# Altium PCB 1.PcbDoc (part 1 of 2)
Units mm, origin at the board's own origin, x right, y up, seen from the top; angles counter-clockwise.
Board outline 30 x 50 mm, 4 copper layers (Top Layer, Middle1, Middle2, Bottom Layer), stack 0.778 mm thick; 91 components, 108 nets, 401 pads, 138 vias.
Unrouted connection lines stored in the file: 70.
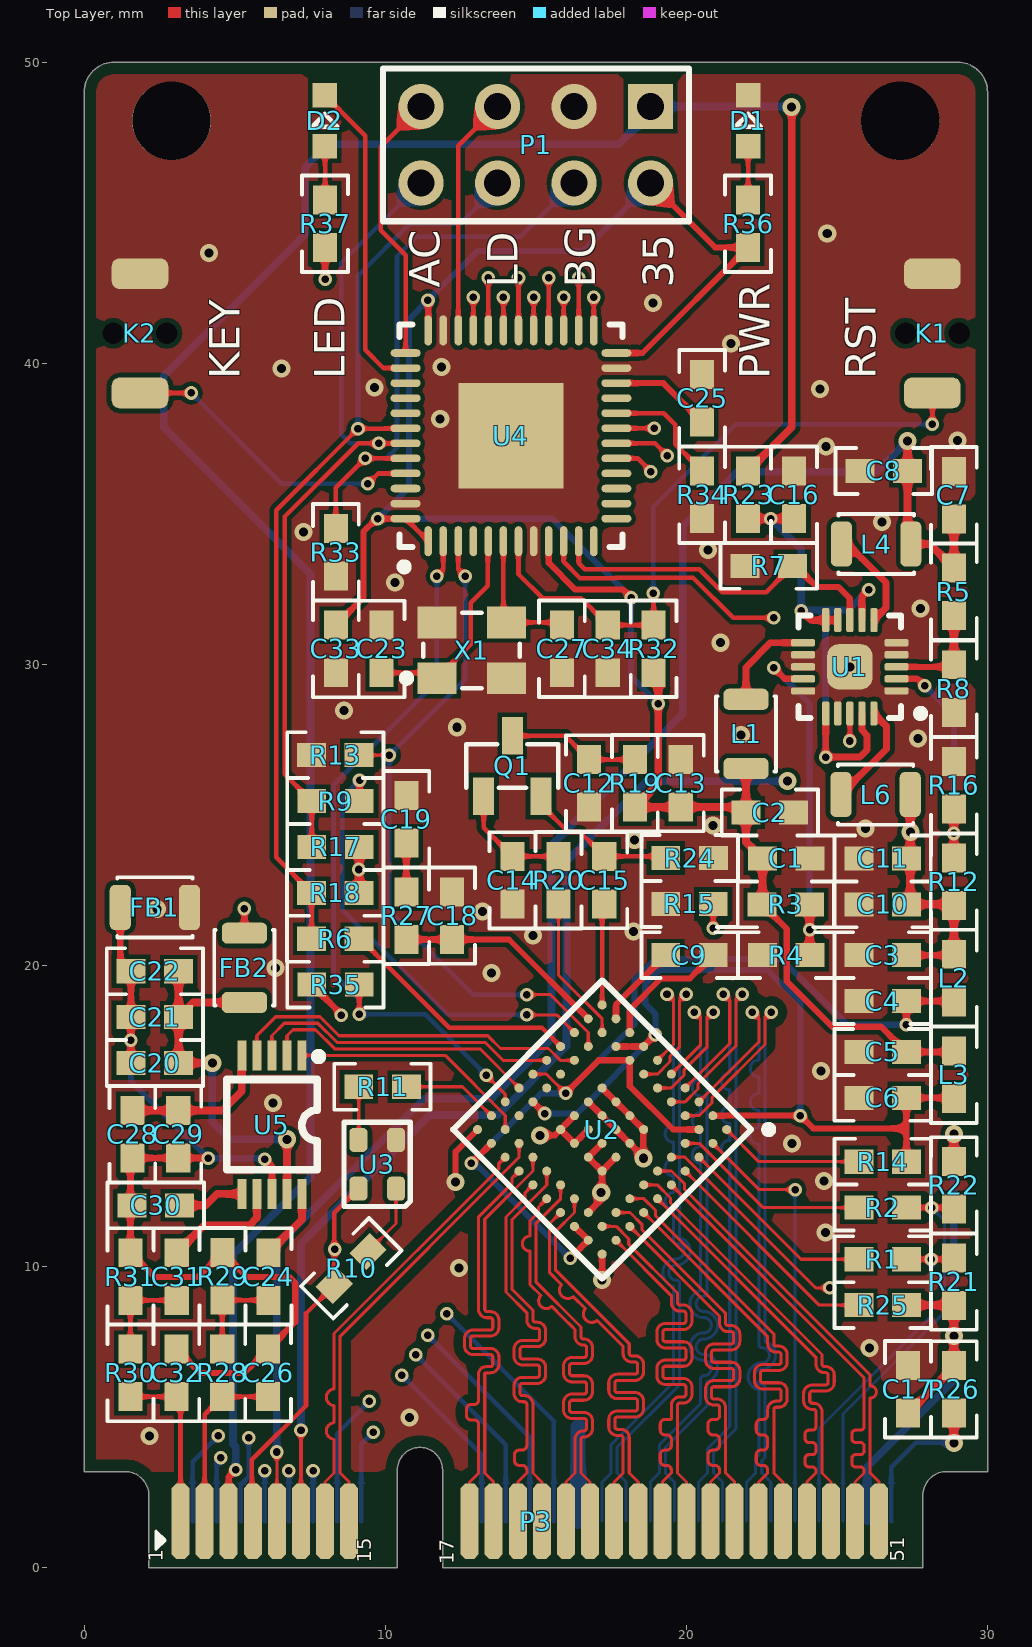
[diagram p0: Top Layer view]
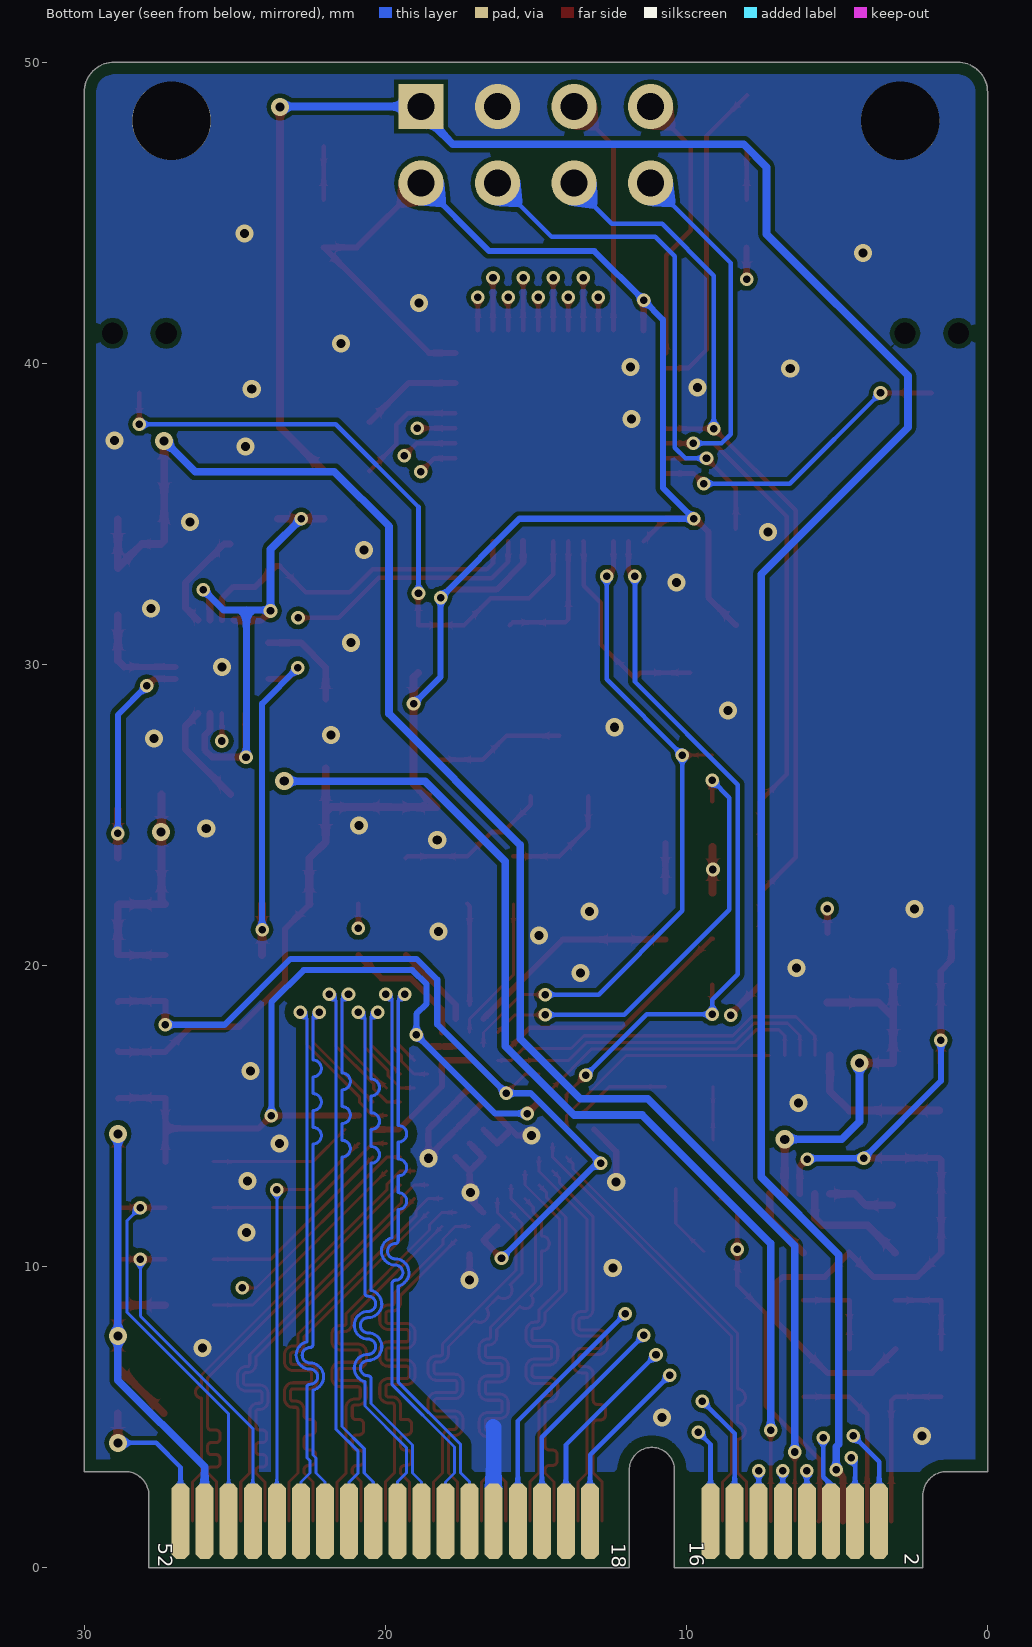
[diagram p1: Bottom Layer view, seen from below]
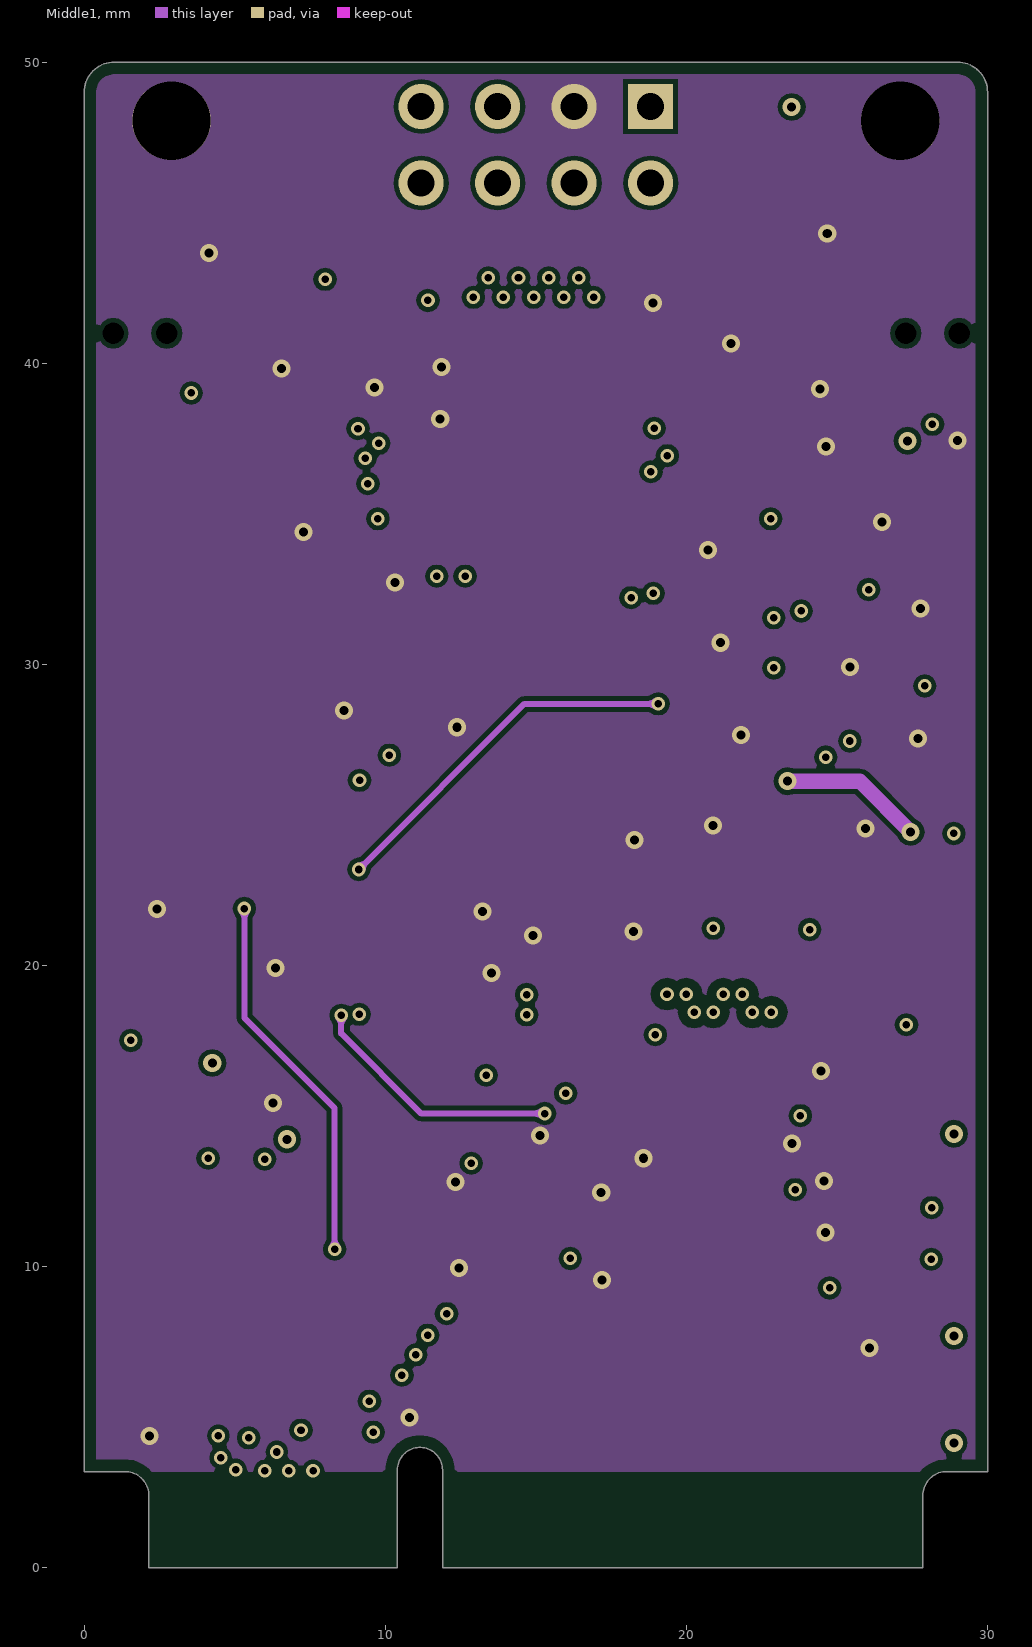
[diagram p2: Middle1]
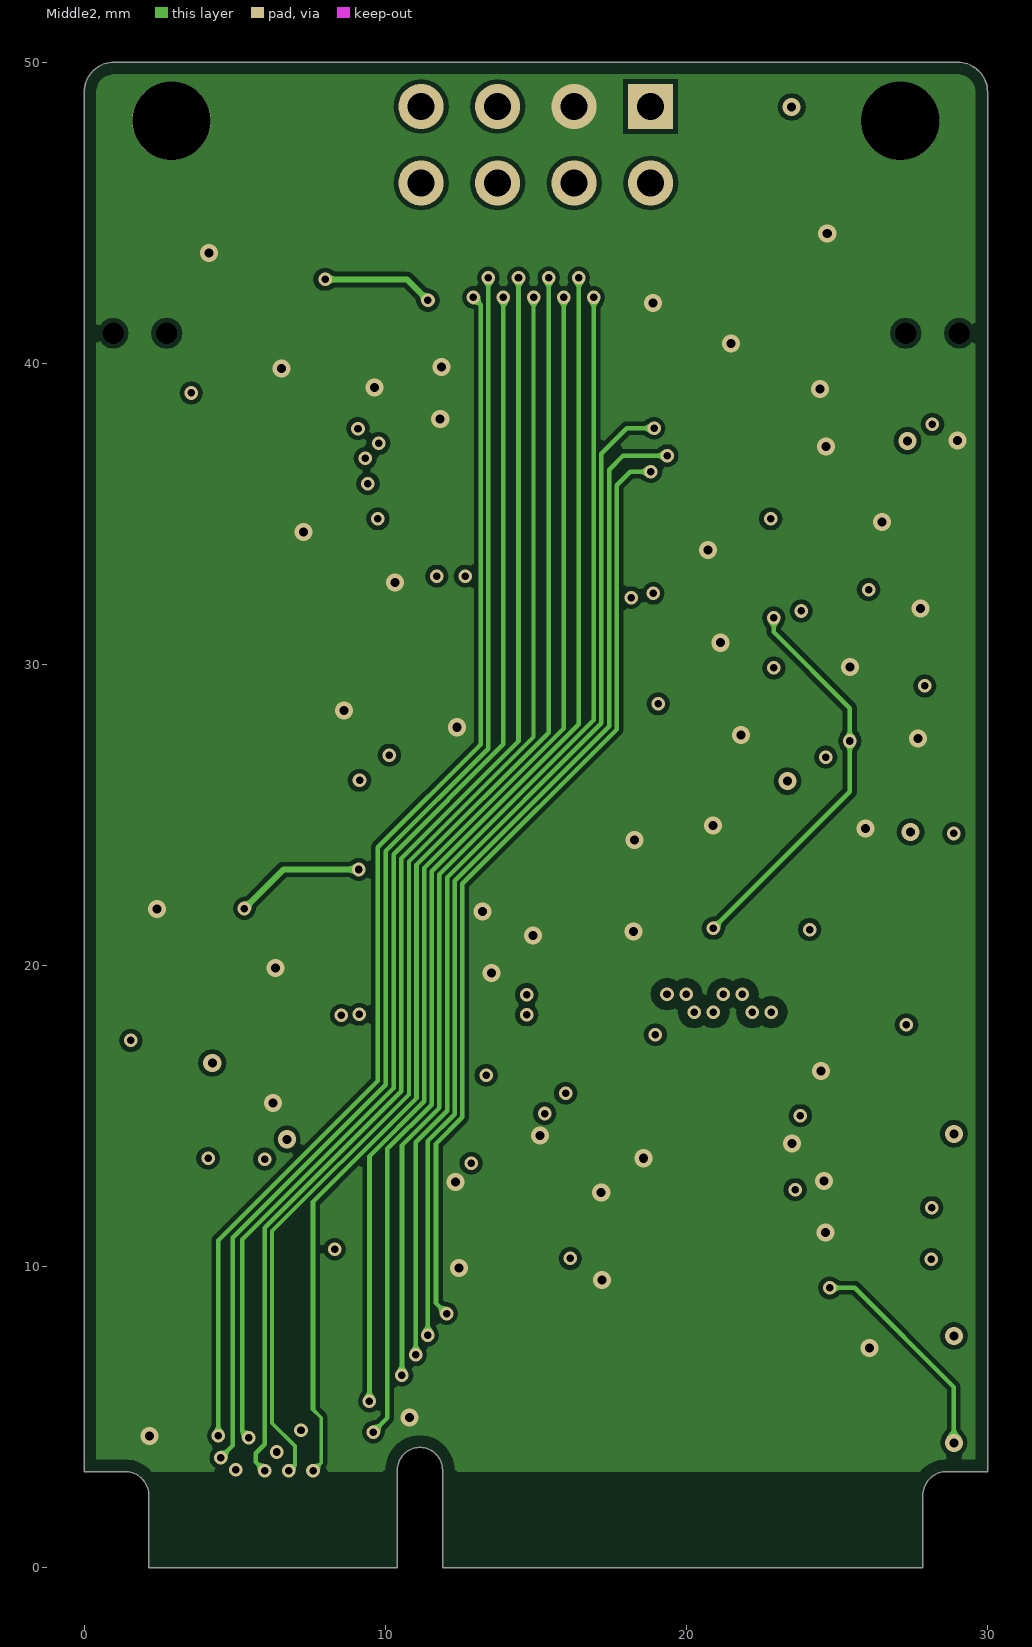
[diagram p3: Middle2]
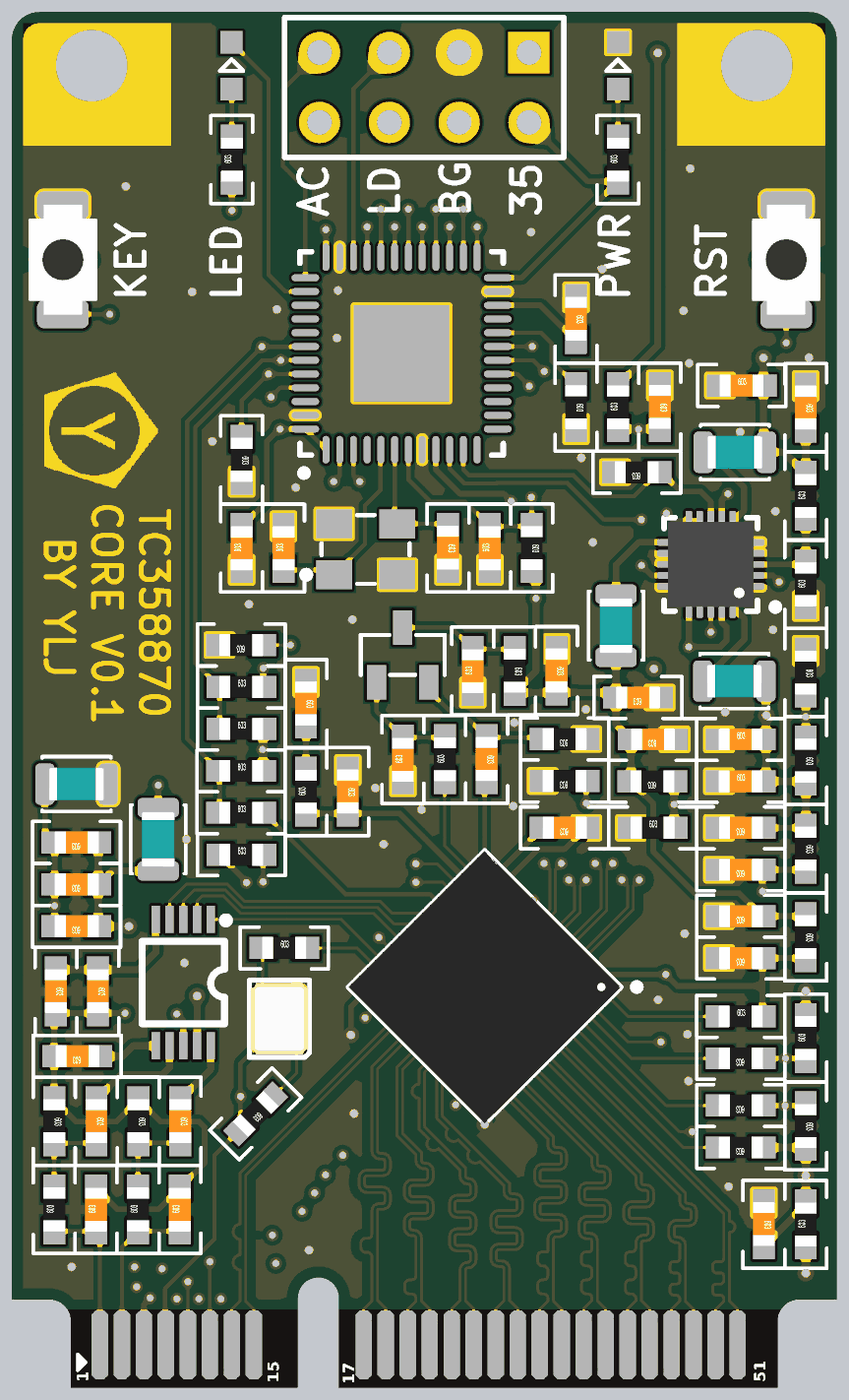
[diagram p5: 3D render of the assembled board from above, using the file's embedded part models]

## Layer stack, top to bottom
Top Solder: solder mask 0.0102, Solder Resist, Dk 3.5
Top Layer: signal copper 0.0356
Dielectric 1: core 0.254, FR-4, Dk 4.2
Middle1: signal copper 0.036
Dielectric 3: prepreg 0.127, Dk 4.2
Middle2: signal copper 0.036
Dielectric 2: core 0.254, Dk 4.2
Bottom Layer: signal copper 0.0356
Bottom Solder: solder mask 0.0102, Solder Resist, Dk 3.5

## Board outline
2.15,0 2.15,2.4 ccw(c1.35,2.4) 1.35,3.2 0,3.2 0,49 cw(c1,49) 1,50 29,50 cw(c29,49) 30,49 30,3.2 28.65,3.2 ccw(c28.65,2.4) 27.85,2.4 27.85,0 11.9,0 11.9,3.25 ccw(c11.15,3.25) 10.4,3.25 10.4,0

## Design rules (kind name [scope] priority, off if disabled: settings)
BoardOutlineClearance [InNet('GND')] p1: gap=0.4 ignorepadtopadclearanceinfootprint=FALSE
Clearance Clearance_2 [(InDifferentialPairClass('All Differential Pairs')) vs InPolygon] p1: gap=0.305 ignorepadtopadclearanceinfootprint=FALSE
Clearance Clearance_1 [InNamedPolygon('GND_L04_P003') Or  InNamedPolygon('GND_L02_P001') Or  InNamedPolygon('GND_L01_P000') Or  InNamedPolygon('GND_L03_P002')] p2: gap=0.152 ignorepadtopadclearanceinfootprint=FALSE
Clearance [All] p3: gap=0.102 ignorepadtopadclearanceinfootprint=FALSE
ComponentClearance [All] p1: gap=0 collisioncheckmode=3 verticalgap=0 showdistances=FALSE
DiffPairsRouting HDMI_DiffPairsRouting [InDifferentialPair ('HDMI_D1') Or InDifferentialPair ('HDMI_C') Or InDifferentialPair ('HDMI_D0') Or InDifferentialPair ('HDMI_D2')] p1: maxlimit=0.102 minlimit=0.102 mostfreqgap=0.102 toplayer_minwidth=0.102 toplayer_maxwidth=0.102 toplayer_prefwidth=0.102 midlayer1_minwidth=0.102 midlayer1_maxwidth=0.102 midlayer1_prefwidth=0.102 midlayer2_minwidth=0.102 midlayer2_maxwidth=0.102 midlayer2_prefwidth=0.102 bottomlayer_minwidth=0.102 bottomlayer_maxwidth=0.102 bottomlayer_prefwidth=0.102 maxuncoupledlength=12.7
DiffPairsRouting MIPI_DiffPairsRouting [InDifferentialPair ('MIPI1_D3') Or InDifferentialPair ('MIPI0_D0') Or InDifferentialPair ('MIPI1_D1') Or InDifferentialPair ('MIPI1_C') Or InDifferentialPair ('MIPI1_D2') Or InDifferentialPair ('MIPI1_D0') Or InDifferentialPair ('MIPI0_C') Or InDifferentialPair ('MIPI0_D1') Or InDifferentialPair ('MIPI0_D2') Or InDifferentialPair ('MIPI0_D3')] p2: maxlimit=0.102 minlimit=0.102 mostfreqgap=0.102 toplayer_minwidth=0.102 toplayer_maxwidth=0.102 toplayer_prefwidth=0.102 midlayer1_minwidth=0.102 midlayer1_maxwidth=0.102 midlayer1_prefwidth=0.102 midlayer2_minwidth=0.102 midlayer2_maxwidth=0.102 midlayer2_prefwidth=0.102 bottomlayer_minwidth=0.102 bottomlayer_maxwidth=0.102 bottomlayer_prefwidth=0.102 maxuncoupledlength=12.7
DiffPairsRouting [All] p3: maxlimit=0.254 minlimit=0.254 mostfreqgap=0.254 toplayer_minwidth=0.381 toplayer_maxwidth=0.381 toplayer_prefwidth=0.381 midlayer1_minwidth=0.381 midlayer1_maxwidth=0.381 midlayer1_prefwidth=0.381 midlayer2_minwidth=0.381 midlayer2_maxwidth=0.381 midlayer2_prefwidth=0.381 bottomlayer_minwidth=0.381 bottomlayer_maxwidth=0.381 bottomlayer_prefwidth=0.381 maxuncoupledlength=12.7
MatchedLengths HDMI_MatchedLengths [InDifferentialPair ('HDMI_D1') Or InDifferentialPair ('HDMI_C') Or InDifferentialPair ('HDMI_D0') Or InDifferentialPair ('HDMI_D2')] p1: tolerance=0.254 checknetsindiffpair=FALSE checkdiffpairvsdiffpair=TRUE checkxsignals=TRUE checkothers=TRUE
MatchedLengths MIPI_MatchedLengths [InDifferentialPair ('MIPI1_D3') Or InDifferentialPair ('MIPI0_D0') Or InDifferentialPair ('MIPI1_D1') Or InDifferentialPair ('MIPI1_C') Or InDifferentialPair ('MIPI1_D2') Or InDifferentialPair ('MIPI1_D0') Or InDifferentialPair ('MIPI0_C') Or InDifferentialPair ('MIPI0_D1') Or InDifferentialPair ('MIPI0_D2') Or InDifferentialPair ('MIPI0_D3')] p2: tolerance=0.254 checknetsindiffpair=FALSE checkdiffpairvsdiffpair=TRUE checkxsignals=TRUE checkothers=TRUE
MinimumSolderMaskSliver [All] p1: minsoldermaskwidth=0
PlaneConnect [All] p1: planeconnectstyle=Direct reliefexpansion=0.508 reliefentries=4 reliefconductorwidth=0.254 reliefairgap=0.254
PolygonConnect [All] p1: connectstyle=Direct reliefconductorwidth=0.254 reliefentries=4 polygonreliefangle="90 Angle" airgapwidth=0.254
RoutingVias [All] p1: holewidth=0.711 width=1.27 viastyle="Through Hole" minholewidth=0.711 minwidth=1.27 maxholewidth=0.711 maxwidth=1.27
SilkToSilkClearance [All] p1: silktosilkclearance=0
SilkToSolderMaskClearance [IsPad] p1: minsilkscreentomaskgap=0 clearancetoexposedcopper=TRUE
SolderMaskExpansion [All] p1: expansion=0.102
Width [All] p1: maxlimit=0.508 minlimit=0.003 preferedwidth=0.102 minimp=50.000000 maximp=50.000000 favimp=50.000000
24 further rules are at their usual default settings.

## Classes and differential pairs
differential pair class HDMI: HDMI_C HDMI_D0 HDMI_D1 HDMI_D2
differential pair class MIPI: MIPI0_C MIPI0_D0 MIPI0_D1 MIPI0_D2 MIPI0_D3 MIPI1_C MIPI1_D0 MIPI1_D1 MIPI1_D2 MIPI1_D3
component class 2: P3
component class 1: C20 C21 C22 C23 C24 C25 C26 C27 C28 C29 C30 C31 C32 C33 C34 D1 D2 FB1 FB2 K1 K2 P1 R28 R29 R30 R31 R32 R33 R34 R36 R37 SW1 SW2 U4 U5 X1
component class 0: C1 C2 C3 C4 C5 C6 C7 C8 C9 C10 C11 C12 C13 C14 C15 C16 C17 C18 C19 L1 L2 L3 L4 L5 L6 Q1 R1 R2 R3 R4 R5 R6 R7 R8 R9 R10 R11 R12 R13 R14 R15 R16 R17 R18 R19 R20 R21 R22 R23 R24 R25 R26 R27 R35 U1 U2 U3
differential pair MIPI1_D3: +MIPI1_D3_P -MIPI1_D3_N
differential pair MIPI1_D2: +MIPI1_D2_P -MIPI1_D2_N
differential pair MIPI1_D1: +MIPI1_D1_P -MIPI1_D1_N
differential pair MIPI1_D0: +MIPI1_D0_P -MIPI1_D0_N
differential pair MIPI1_C: +MIPI1_C_P -MIPI1_C_N
differential pair MIPI0_D3: +MIPI0_D3_P -MIPI0_D3_N
differential pair MIPI0_D2: +MIPI0_D2_P -MIPI0_D2_N
differential pair MIPI0_D1: +MIPI0_D1_P -MIPI0_D1_N
differential pair MIPI0_D0: +MIPI0_D0_P -MIPI0_D0_N
differential pair MIPI0_C: +MIPI0_C_P -MIPI0_C_N
differential pair HDMI_D2: +HDMI_D2_P -HDMI_D2_N
differential pair HDMI_D1: +HDMI_D1_P -HDMI_D1_N
differential pair HDMI_D0: +HDMI_D0_P -HDMI_D0_N
differential pair HDMI_C: +HDMI_C_P -HDMI_C_N

## Components (designator, comment, footprint, x,y, rotation, side; value= is the part's Value field where it differs from the comment)
C1 "10uF" 0603_CAP 23.315,23.558 r180 top
C2 "100nF" 0603_CAP 22.769,25.082 r180 top
C3 "10uF" 0603_CAP 26.515,20.345 r180 top
C4 "100nF" 0603_CAP 26.515,18.821 r180 top
C5 "10uF" 0603_CAP 26.515,17.132 r180 top
C6 "100nF" 0603_CAP 26.515,15.608 r180 top
C7 "10uF" 0603_CAP 28.88,35.613 r270 top
C8 "100nF" 0603_CAP 26.553,36.424 r0 top
C9 "100nF" 0603_CAP 20.102,20.345 r180 top
C10 "10uF" 0603_CAP 26.515,22.034 r0 top
C11 "100nF" 0603_CAP 26.515,23.558 r0 top
C12 "100nF" 0603_CAP 16.764,26.05 r90 top
C13 "100nF" 0603_CAP 19.812,26.056 r270 top
C14 "100nF" 0603_CAP 14.224,22.832 r90 top
C15 "100nF" 0603_CAP 17.272,22.837 r270 top
C16 "10uF" 0603_CAP 23.571,35.634 r270 top
C17 "10uF" 0603_CAP 27.356,5.928 r270 top
C18 "100nF" 0603_CAP 12.217,21.656 r270 top
C19 "100nF" 0603_CAP 10.699,24.857 r270 top
C20 "0402" 0603_CAP 2.347,16.764 r180 top value=NC
C21 "0402" 0603_CAP 2.347,18.288 r180 top value=100nF
C22 "0603" 0603_CAP 2.347,19.812 r180 top value=10uF
C23 "18pF" 0603_CAP 9.881,30.515 r90 top
C24 "1206" 0603_CAP 6.121,9.675 r270 top value=3.3uF
C25 "2.2uF" 0603_CAP 20.523,38.839 r270 top
C26 "0603" 0603_CAP 6.109,6.474 r90 top value=3nF
C27 "18pF" 0603_CAP 15.862,30.516 r270 top
C28 "0603" 0603_CAP 1.6,14.399 r270 top value=10uF
C29 "0402" 0603_CAP 3.124,14.399 r270 top value=100nF
C30 "0603" 0603_CAP 2.372,12.04 r180 top value=10uF
C31 "1206" 0603_CAP 3.073,9.675 r270 top value=3.3uF
C32 "0603" 0603_CAP 3.061,6.474 r90 top value=3nF
C33 "10uF" 0603_CAP 8.357,30.515 r90 top
C34 "100nF" 0603_CAP 17.386,30.515 r90 top
D1 "color?" SMDLED-0603 22.047,47.2 r90 top
D2 "color?" SMDLED-0603 7.988,47.2 r90 top
FB1 "0603" 2520-L 2.349,21.933 r180 top value=120E
FB2 "0603" 2520-L 5.321,19.926 r270 top value=120E
K1 "TACT 2P" ButtonTACT_3x4x2_180H 28.169,40.996 r90 top value=3x4
K2 "TACT 2P" ButtonTACT_3x4x2_180H 1.854,40.996 r90 top value=3x4
L1 "2.2uH" 2520-L 21.979,27.693 r270 top
L2 "120R" 0603_RES 28.88,19.586 r270 top
L3 "120R" 0603_RES 28.88,16.373 r270 top
L4 "2.2uH" 2520-L 26.302,33.998 r0 top
L6 "2.2uH" 2520-L 26.282,25.679 r0 top
P1 "Header 4X2" HDR2X4 18.81,48.527 r180 top
P3 "接口_Mini-PCIe_金手指排序" 接口_Mini_PCIe_金手指 0,0 r0 top value=Mini-PCIe_金?
Q1 "S8050" SOT-23-3_L2.9-W1.3-P1.90-LS2.4-BR 14.217,26.629 r90 top
R1 "33R" 0603_RES 26.515,10.249 r180 top
R2 "33R" 0603_RES 26.515,11.963 r180 top
R3 "510K" 0603_RES 23.302,22.034 r180 top
R4 "110K" 0603_RES 23.315,20.345 r0 top
R5 "200K" 0603_RES 28.88,32.413 r90 top
R6 "33R" 0603_RES 8.341,20.892 r0 top
R7 "100K" 0603_RES 22.73,33.274 r180 top
R8 "100K" 0603_RES 28.88,29.2 r90 top
R9 "33R" 0603_RES 8.346,25.463 r0 top
R10 "NC" 0603_RES 8.865,9.944 r225 top
R11 "33R" 0603_RES 9.909,15.977 r0 top
R12 "100K" 0603_RES 28.88,22.786 r270 top
R13 "10K" 0603_RES 8.341,26.987 r180 top
R14 "2K" 0603_RES 26.515,13.487 r0 top
R15 "100K" 0603_RES 20.102,22.047 r180 top
R16 "110K" 0603_RES 28.88,25.987 r270 top
R17 "4.7K" 0603_RES 8.346,23.939 r0 top
R18 "4.7K" 0603_RES 8.341,22.415 r0 top
R19 "33R" 0603_RES 18.288,26.05 r270 top
R20 "33R" 0603_RES 15.748,22.837 r90 top
R21 "47K" 0603_RES 28.88,9.502 r270 top
R22 "47K" 0603_RES 28.88,12.703 r90 top
R23 "0R" 0603_RES 22.047,35.634 r90 top
R24 "33R" 0603_RES 20.104,23.571 r180 top
R25 "1K" 0603_RES 26.515,8.725 r180 top
R26 "2.2K" 0603_RES 28.88,5.928 r90 top
R27 "33R" 0603_RES 10.699,21.656 r90 top
R28 "0603" 0603_RES 4.585,6.474 r90 top value=470E
R29 "0402" 0603_RES 4.597,9.68 r270 top value=10K
R30 "0603" 0603_RES 1.537,6.474 r90 top value=470E
R31 "0402" 0603_RES 1.537,9.675 r270 top value=10K
R32 "10K" 0603_RES 18.91,30.516 r270 top
R33 "100K" 0603_RES 8.357,33.721 r270 top
R34 "100K" 0603_RES 20.523,35.634 r270 top
R35 "10K" 0603_RES 8.346,19.367 r0 top
R36 "1K" 0603_RES 22.047,44.638 r90 top value=22R
R37 "1K" 0603_RES 8,44.638 r90 top value=22R
U1 "EA3036" QFN-20 25.425,29.921 r0 top
U2 "TC358870XBG" BGA80_7*7_TC358870XBG 17.2,14.557 r225 top
U3 "晶振-4Pin" 晶振2520 9.731,13.401 r90 top
U4 "STM32F401CBU6" 401cb 14.173,37.592 r270 top
U5 "MSOP_10" TSSOP-10_L3.0-W3.0-P0.50-LS4.9-BL 6.236,14.719 r180 top value=CS4344/ES7144LV
X1 "12M" XTAL3225 11.721,29.544 r180 top

## Footprints (in the part's own frame and the unit in brackets; to place one, negate y for a bottom-side part, rotate by r counter-clockwise, add the part's x,y. Pads: shape width x height; smd on the part's side, far side on the other; paste and mask are expansions set on the pad)
401cb [mm] "QFN, 48-Leads, Body 7.1x7.1mm, Pitch 0.5mm, Thermal Pad 5.6x5.6mm, IPC Low Density"
  oval 1x0.25 smd: 1(3.5,-2.75) 2(3.5,-2.25) 3(3.5,-1.75) 4(3.5,-1.25) 5(3.5,-0.75) 6(3.5,-0.25) 7(3.5,0.25) 8(3.5,0.75) 9(3.5,1.25) 10(3.5,1.75) 11(3.5,2.25) 12(3.5,2.75) 25(-3.5,2.75) 26(-3.5,2.25) 27(-3.5,1.75) 28(-3.5,1.25) 29(-3.5,0.75) 30(-3.5,0.25) 31(-3.5,-0.25) 32(-3.5,-0.75) 33(-3.5,-1.25) 34(-3.5,-1.75) 35(-3.5,-2.25) 36(-3.5,-2.75)
  oval 0.25x1 smd: 13(2.75,3.5) 14(2.25,3.5) 15(1.75,3.5) 16(1.25,3.5) 17(0.75,3.5) 18(0.25,3.5) 19(-0.25,3.5) 20(-0.75,3.5) 21(-1.25,3.5) 22(-1.75,3.5) 23(-2.25,3.5) 24(-2.75,3.5) 37(-2.75,-3.5) 38(-2.25,-3.5) 39(-1.75,-3.5) 40(-1.25,-3.5) 41(-0.75,-3.5) 42(-0.25,-3.5) 43(0.25,-3.5) 44(0.75,-3.5) 45(1.25,-3.5) 46(1.75,-3.5) 47(2.25,-3.5) 48(2.75,-3.5)
  rect 3.5x3.5 smd: 49(0,0)
  silkscreen extent -3.7,-3.7 4.47,3.7, body extent -3.55,-3.55 3.55,3.55, height 0.6
0603_CAP [mm]
  rect 0.96x0.8 smd: 1(-0.79,0) 2(0.79,0)
  silkscreen extent -1.6,-0.76 1.6,0.76, body extent -0.81,-0.4 0.79,0.4, height 0.3
0603_RES [mm]
  rect 0.96x0.8 smd: 1(-0.79,0) 2(0.79,0)
  silkscreen extent -1.6,-0.76 1.6,0.76, body extent -0.8,-0.4 0.8,0.4, height 0.3
2520-L [mm]
  rrect50% 0.7x1.5 smd: 1(1.15,0) 2(-1.15,0)
  silkscreen extent -1.25,-1 1.25,1, body extent -1,-0.6 1,0.6, height 0.92
BGA80_7*7_TC358870XBG [mm]
  round 0.3 smd paste+0 mask+0: A1(-2.925,2.925) A2(-2.275,2.925) A3(-1.625,2.925) A4(-0.975,2.925) A5(-0.325,2.925) A6(0.325,2.925) A7(0.975,2.925) A8(1.625,2.925) A9(2.275,2.925) A10(2.925,2.925) B1(-2.925,2.275) B2(-2.275,2.275) B3(-1.625,2.275) B4(-0.975,2.275) B5(-0.325,2.275) B6(0.325,2.275) B7(0.975,2.275) B8(1.625,2.275) B9(2.275,2.275) B10(2.925,2.275) C1(-2.925,1.625) C2(-2.275,1.625) C9(2.275,1.625) C10(2.925,1.625) D1(-2.925,0.975) D2(-2.275,0.975) D4(-0.975,0.975) D5(-0.325,0.975) D6(0.325,0.975) D7(0.975,0.975) D9(2.275,0.975) D10(2.925,0.975) E1(-2.925,0.325) E2(-2.275,0.325) E4(-0.975,0.325) E5(-0.325,0.325) E6(0.325,0.325) E7(0.975,0.325) E9(2.275,0.325) E10(2.925,0.325) F1(-2.925,-0.325) F2(-2.275,-0.325) F4(-0.975,-0.325) F5(-0.325,-0.325) F6(0.325,-0.325) F7(0.975,-0.325) F9(2.275,-0.325) F10(2.925,-0.325) G1(-2.925,-0.975) G2(-2.275,-0.975) G4(-0.975,-0.975) G5(-0.325,-0.975) G6(0.325,-0.975) G7(0.975,-0.975) G9(2.275,-0.975) G10(2.925,-0.975) H1(-2.925,-1.625) H2(-2.275,-1.625) H9(2.275,-1.625) H10(2.925,-1.625) J1(-2.925,-2.275) J2(-2.275,-2.275) J3(-1.625,-2.275) J4(-0.975,-2.275) J5(-0.325,-2.275) J6(0.325,-2.275) J7(0.975,-2.275) J8(1.625,-2.275) J9(2.275,-2.275) J10(2.925,-2.275) K1(-2.925,-2.925) K2(-2.275,-2.925) K3(-1.625,-2.925) K4(-0.975,-2.925) K5(-0.325,-2.925) K6(0.325,-2.925) K7(0.975,-2.925) K8(1.625,-2.925) K9(2.275,-2.925) K10(2.925,-2.925)
  silkscreen extent -4.04,-3.5 3.5,4.04, body extent -3.5,-3.5 3.5,3.5, height 1
ButtonTACT_3x4x2_180H [mil]
  round 0 hole 28: 0(0,35) 0(0,-35)
  rrect50% 40x74 smd: 1(-78,0) 2(78,0)
  body extent -79,-49 79,49, height 63
HDR2X4 [mm] "Connector; Header; 4x2 Position"
  rect 1.5x1.5 hole 0.9: 1(0,0)
  round 1.5 hole 0.9: 2(0,2.54) 3(2.54,0) 4(2.54,2.54) 5(5.08,0) 6(5.08,2.54) 7(7.62,0) 8(7.62,2.54)
  silkscreen extent -1.27,-1.27 8.89,3.81
QFN-20 [mm] "QFN, 20-Leads, Body 3.00x3.00mm, Pitch 0.40mm, Thermal Pad 1.65x1.65mm, IPC Medium Density"
  rrect50% 0.8x0.24 smd: 1(1.55,-0.8) 2(1.55,-0.4) 3(1.55,0) 4(1.55,0.4) 5(1.55,0.8) 11(-1.55,0.8) 12(-1.55,0.4) 13(-1.55,0) 14(-1.55,-0.4) 15(-1.55,-0.8)
  rrect50% 0.24x0.8 smd: 6(0.8,1.55) 7(0.4,1.55) 8(0,1.55) 9(-0.4,1.55) 10(-0.8,1.55) 16(-0.8,-1.55) 17(-0.4,-1.55) 18(0,-1.55) 19(0.4,-1.55) 20(0.8,-1.55)
  rrect50% 1.5x1.5 smd: 21(0,0)
  silkscreen extent -1.7,-1.7 2.48,1.7, body extent -1.56,-1.56 1.56,1.56, height 0.8
SMDLED-0603 [mil]
  rect 32x32 smd: 1(0,0) 2(66.93,0)
  silkscreen extent 26,-17 42,17
SOT-23-3_L2.9-W1.3-P1.90-LS2.4-BR [mm]
  rect 1.25x0.7 smd: 1(-1,0.95) 2(-1,-0.95) 3(1,0)
  silkscreen extent -0.73,-1.53 0.73,1.53
TSSOP-10_L3.0-W3.0-P0.50-LS4.9-BL [mm]
  rect 0.3x1 smd: 1(-1,-2.3) 2(-0.5,-2.3) 3(0,-2.3) 4(0.5,-2.3) 5(1,-2.3) 6(1,2.3) 7(0.5,2.3) 8(0,2.3) 9(-0.5,2.3) 10(-1,2.3)
  silkscreen extent -1.68,-2.39 1.5,1.5
XTAL3225 [mm]
  rect 1.3x1.05 smd: 1(0,0) 2(-2.3,0) 3(-2.3,-1.85) 4(0,-1.85)
  silkscreen extent -2.74,-2.17 1.14,0.33
接口_Mini_PCIe_金手指 [mm]
  oct 0.6x2.5 smd mask+0: 1(3.2,1.55) 3(4,1.55) 5(4.8,1.55) 7(5.6,1.55) 9(6.4,1.55) 11(7.2,1.55) 13(8,1.55) 15(8.8,1.55) 17(12.8,1.55) 19(13.6,1.55) 21(14.4,1.55) 23(15.2,1.55) 25(16,1.55) 27(16.8,1.55) 29(17.6,1.55) 31(18.4,1.55) 33(19.2,1.55) 35(20,1.55) 37(20.8,1.55) 39(21.6,1.55) 41(22.4,1.55) 43(23.2,1.55) 45(24,1.55) 47(24.8,1.55) 49(25.6,1.55) 51(26.4,1.55)
  oct 0.6x2.5 smd far side mask+0: 2(3.6,1.55) 4(4.4,1.55) 6(5.2,1.55) 8(6,1.55) 10(6.8,1.55) 12(7.6,1.55) 14(8.4,1.55) 16(9.2,1.55) 18(13.2,1.55) 20(14,1.55) 22(14.8,1.55) 24(15.6,1.55) 26(16.4,1.55) 28(17.2,1.55) 30(18,1.55) 32(18.8,1.55) 34(19.6,1.55) 36(20.4,1.55) 38(21.2,1.55) 40(22,1.55) 42(22.8,1.55) 44(23.6,1.55) 46(24.4,1.55) 48(25.2,1.55) 50(26,1.55) 52(26.8,1.55)
  silkscreen extent 2.39,0.61 2.69,1.22
晶振2520 [mm]
  rrect50% 0.8x0.6 smd: 1(-0.81,-0.625) 2(0.81,-0.625) 3(0.81,0.625) 4(-0.81,0.625)
  silkscreen extent -1.4,-1.1 1.4,1.1, body extent -1.3,-1.05 1.3,1.05, height 0.55

## Part data
C1 C2 C3 C4 C5 C6 C7 C8 C9 C10 C11 C12 C13 C14 C15 C16 C17 C18 C19 C23 C25 C27 C33 C34: library part C
C20 C21 C22 C24 C26 C28 C29 C30 C31 C32: library part Cap, "电容", LatestRevisionDate=17-Jul-2002, LatestRevisionNote="Re-released for DXP Platform.", PackageDescription="Radial Cap, Thru-Hole; 2 Leads; 0.3 in Pin Spacing", PackageReference=RAD-0.3, Published=8-Jun-2000, Publisher="Altium Limited"
D1 D2: library part LED_0402, "LED", Type=0402
FB1 FB2: library part FB, "磁珠", Code_IEC=1005, Code_JEITA=0402, LatestRevisionDate=29-May-2009, LatestRevisionNote="IPC-7351 Footprint Added.", PackageDescription="Chip Inductor", PackageReference=0402-A, Published=8-Jun-2000, Publisher="Altium Limited"
K1 K2: library part ButtonTACT_3x4x2_180, "Button", Type="TACT 2P"
L1 L4 L6: library part L_SOP
L2 L3 R1 R2 R3 R4 R5 R6 R7 R8 R9 R10 R11 R12 R13 R14 R15 R16 R17 R18 R19 R20 R21 R22 R23 R24 R25 R26 R27 R32 R33 R34 R35: library part R
P1: "Header, 4-Pin, Dual row", LatestRevisionDate=17-Jul-2002, LatestRevisionNote="Re-released for DXP Platform.", Publisher="Altium Limited"
P3: "接口"
Q1: library part S8050_C779775, BOM_Manufacturer=ZRE, BOM_Manufacturer Part=S8050, BOM_Supplier=LCSC, BOM_Supplier Part=C779775, Contributor=LCSC, spicePre=Q, spiceSymbolName=S8050_C779775
R28 R29 R30 R31: library part R, "电阻", LatestRevisionDate=17-Jul-2002, LatestRevisionNote="Re-released for DXP Platform.", PackageDescription="Axial Device, Thru-Hole; 2 Leads; 0.4 in Pin Spacing", PackageReference=AXIAL-0.4, Published=8-Jun-2000, Publisher="Altium Limited"
R36 R37: library part 电阻-0402, "Resistor"
U1: "EA3036 is a 3CH power management IC for applications powered by one Li-Ion battery or a DC 5V adapter."
U3: "5032 有源"
U4: "ARM Cortex-M4 32-bit MCU+FPU, 105 DMIPS, 128 kB Flash, 64 kB Internal RAM, 36 I/Os, 48-pin UFQFPN, -40 to 85 degC, Tray", I/Os (High Current)=36, Manufacturer=STMicroelectronics, Operating Frequency(F) (Processor speed) (MHz)=84, Supplier Part Number 1=19X6215, Supply Voltage(Vcc) max (V)=3.6, Supply Voltage(Vcc) min (V)=1.8, ComponentLink1Description="Manufacturer URL", ComponentLink1URL=http://www.st.com/web/en/home.html, ComponentLink2Description=Datasheet, ComponentLink2URL=http://www.st.com/st-web-ui/static/active/en/resource/technical/document/data_brief/DM00071938.pdf, ComponentLink3Description="Package Specification", ComponentLink3URL=http://www.st.com/st-web-ui/static/active/en/resource/technical/document/data_brief/DM00071938.pdf, Core="ARM Cortex-M4", DatasheetVersion="Rev. 1", FLASH Size (Prog) (kB)=128, Internal RAM Size (kB)=64, Mounting Technology="Surface Mount", PackageDescription="48-Pin Ultra Thin Fine Pitch Quad Flat No-Lead, 7 x 7 x 0.6 mm Body, 0.5 mm Pitch, Exposed Pad", PackageReference=UFQFPN48, PackageVersion="Rev. 1, 04/2013", Packing=Tray, PartNumber=STM32F401CBU6, Supplier 1=Newark, Supplier 2=Mouser, Supplier Part Number 2=511-STM32F401CBU6
U5: library part CS4344, "DAC"
X1: library part XTAL-4P, "4脚无源晶振"

## Free pads (board coordinates)
  round 2.6 hole 2.6 unplated: 0(2.9,48.05) 0(27.1,48.05)

## Via types
v1: diameter 0.45, hole 0.25, Top Layer to Bottom Layer, tented both sides, 84 vias
v2: diameter 0.6, hole 0.3, Top Layer to Bottom Layer, tented both sides, 54 vias

## Nets (pads, with @x,y where several pads share a name; then routed paths per layer and width w, separated by ;. In a path a pad name is that pad's centre, name@x,y a point inside that pad or via, vN(x,y) a via of type N, cw(c..) or ccw(c..) an arc to the next point about the centre after c; other vN are vias at no path point)
1V1: C3.1 C10.2 C11.2 L2.1 L6.1 P3.11 R12.2 | length 48.6
  Top Layer w0.127: P3.11@7.2,1.55 v1(7.201,4.572) v1(7.201,4.572)
  Top Layer w0.203: C3.1@27.305,20.345 28.849,20.345 L2.1@28.88,20.376
  Top Layer w0.254: L6.1@27.432,25.679 27.432,22.162 C10.2@27.305,22.034 28.842,22.034 R12.2@28.88,21.996 L2.1@28.88,20.376
  Middle1 w0.508: v2(23.355,26.124) 25.756,26.124 v2(27.445,24.435)
  Bottom Layer w0.254: v1(7.201,4.572) 7.201,10.77 11.468,15.037 13.729,15.037 16.015,17.323 16.015,23.457 18.682,26.124 v2(23.355,26.124)
1V8: C7.2 C8.2 L4.1 P3.9 R5.2 | length 55.4
  Top Layer w0.102: P3.9@6.4,1.55 v1(6.4,3.847)
  Top Layer w0.254: v2(27.343,37.427) C8.2@27.343,36.424 27.343,34.107 L4.1@27.452,33.998 28.085,33.998 R5.2@28.88,33.203 C7.2@28.88,34.823
  Bottom Layer w0.254: v1(6.4,3.847) 6.4,10.693 11.29,15.583 13.525,15.583 15.519,17.577 15.519,24.003 19.875,28.359 19.875,34.582 21.692,36.398 26.314,36.398 v2(27.343,37.427)
3V3: C1.2 C2.2 C5.1 C13.2 C33.2 FB2.2 L1.1 L3.1 P1.2 P3.7 R3.2 R10.2 R17.2 R18.2 R19.2 R32.2 R36.1 R37.1 U3.4 U4.1 U4.9 U4.24 U4.36 U4.48 | length 122.9
  Top Layer w0.152: P3.7@5.6,1.55 5.572,1.578 5.572,3.591 7.366,5.385 7.366,8.445 R10.2@8.306,9.385 8.306,11.791 U3.4@9.106,12.591 ; R18.2@9.131,22.415 R18.2@9.136,22.421 ; U4.48@10.673,34.842 U4.1@11.423,34.092
  Top Layer w0.203: FB2.2@5.321,21.076 v1(5.321,21.895) ; R37.1@8,43.848 v1(8,42.787) v1(8,42.787) ; C33.2@8.357,31.305 9.271,32.22 9.271,34.404 9.709,34.842 U4.48@10.673,34.842 ; v1(11.417,42.088) 11.423,42.082 U4.36@11.423,41.092 ; U4.9@15.423,34.092 15.423,33.37 16.307,32.487 17.894,32.487 v1(18.161,32.22) ; U4.24@17.673,40.342 18.541,40.342 R36.1@22.047,43.848 20.949,43.848 P1.2@18.81,45.987 ; R3.2@22.512,22.034 23.33,21.217 23.33,19.482 24.841,17.97 26.467,17.97 C5.1@27.305,17.132 28.849,17.132 L3.1@28.88,17.163
  Top Layer w0.254: R18.2@9.136,22.421 R17.2@9.136,23.939 ; R32.2@18.91,29.726 19.063,29.573 v1(19.063,28.689) 19.063,26.035 R19.2@18.288,25.26 19.807,25.26 C13.2@19.812,25.265 21.796,25.265 C2.2@21.979,25.082 ; L1.1@21.979,26.543 C2.2@21.979,25.082 ; R3.2@22.512,22.034 22.525,22.047 C1.2@22.525,23.558 21.979,24.105 C2.2@21.979,25.082
  Middle1 w0.203: v1(5.321,21.895) 5.321,18.263 8.319,15.265 v1(8.319,10.579) ; v1(9.119,23.19) 14.618,28.689 v1(19.063,28.689)
  Middle2 w0.203: v1(5.321,21.895) 6.617,23.19 v1(9.119,23.19) ; v1(8,42.787) 10.718,42.787 v1(11.417,42.088)
  Bottom Layer w0.203: P1.2@18.81,45.987 16.549,43.726 13.056,43.726 v1(11.417,42.088) 10.782,41.453 10.782,35.865 v1(9.754,34.836) 15.545,34.836 v1(18.161,32.22) 18.161,29.591 v1(19.063,28.689)
5V: P1.1 P3.5 R23.2 | length 79.8
  Top Layer w0.203: P3.5@4.8,1.55 4.8,3.022 v1(5.029,3.251)
  Top Layer w0.254: R23.2@22.047,36.424 23.495,37.871 v2(23.495,48.514)
  Bottom Layer w0.254: v1(5.029,3.251) 5.029,4.026 4.94,4.115 4.94,10.401 7.518,12.979 7.518,32.995 2.642,37.871 2.642,39.586 7.341,44.285 7.341,46.507 8.103,47.269 17.755,47.269 19.012,48.527 23.482,48.527 v2(23.495,48.514)
5V_E: C16.2 R23.1 U1.7 U1.9 U1.10 U1.16 U1.19 | length 19.1
  Top Layer w0.229: v1(23.812,31.775) 24.117,31.471 U1.10@24.625,31.471 U1.9@25.025,31.471 ; U1.16@24.625,28.371 v1(24.625,26.924) 25.756,26.924 25.997,27.165 25.997,27.648 25.825,27.819 U1.19@25.825,28.371 ; U1.7@25.825,31.471 25.825,32.264 v1(26.048,32.487)
  Top Layer w0.254: R23.1@22.047,34.844 C16.2@23.571,34.844
  Bottom Layer w0.229: v1(23.812,31.775) 23.851,31.813 24.613,31.813 ; v1(24.625,26.924) 24.613,26.937 24.613,31.813 ; v1(26.048,32.487) 25.375,31.813 24.613,31.813
  Bottom Layer w0.254: v1(22.796,34.836) 23.812,33.82 v1(23.812,31.775)
AGND: C20.2 C21.2 C22.2 C26.2 C28.2 C29.2 C30.2 C32.2 FB1.1 R29.1 R31.1 U5.8 | length 32
  Top Layer w0.203: FB1.1@1.199,21.933 1.199,20.169 C22.2@1.557,19.812 C21.2@1.557,18.288 C20.2@1.557,16.764 ; C32.2@3.061,7.264 3.848,6.477 5.321,6.477 C26.2@6.109,7.264 7.01,8.166 7.01,9.461 6.807,9.665 5.403,9.665 R29.1@4.597,10.47 3.792,9.665 2.337,9.665 R31.1@1.537,10.465 1.537,13.546 C28.2@1.6,13.609 C29.2@3.124,13.609 4.107,13.609 v1(4.115,13.602) ; v1(5.994,13.576) 6.236,13.335 U5.8@6.236,12.419
  Bottom Layer w0.203: v1(1.549,17.513) 1.549,16.167 v1(4.115,13.602) 5.969,13.602 v1(5.994,13.576)
AUDIO_L: C32.1 P3.1 R30.1 | length 5.7
  Top Layer w0.152: R30.1@1.537,5.684 C32.1@3.061,5.684 3.2,5.545 P3.1@3.2,1.55
AUDIO_R: C26.1 P3.3 R28.1 | length 5.9
  Top Layer w0.152: P3.3@4,1.55 4,5.1 R28.1@4.585,5.684 C26.1@6.109,5.684
BOOT0: P1.4 R33.1 U4.44 | length 18.5
  Top Layer w0.152: R33.1@8.357,34.511 8.357,35.865 v1(9.334,36.842) U4.44@10.673,36.842
  Bottom Layer w0.152: v1(9.334,36.842) 10.032,36.842 10.389,37.198 10.389,43.548 11.036,44.196 14.479,44.196 P1.4@16.27,45.987
BOOT1: R34.1 U4.20 | length 4
  Top Layer w0.152: U4.20@17.673,38.342 19.253,38.342 19.634,37.96 19.634,37.313 R34.1@20.523,36.424
CEC: P3.44 U2.A2 | length 14.5
  Top Layer w0.102: U2.A2@20.877,14.097 22.414,12.56 v1(23.609,12.56)
  Bottom Layer w0.102: v1@23.571,12.687 23.6,12.659 P3.44@23.6,1.55
CLK: P1.7 U4.37 | length 9.1
  Top Layer w0.152: U4.37@10.673,40.342 10.673,43.594 9.855,44.412 9.855,47.192 P1.7@11.19,48.527
DAOUT: R20.1 U2.J2 | length 4.9
  Top Layer w0.102: R20.1@15.748,22.047 15.748,19.685 17.2,18.233 U2.J2@17.2,17.774
DDC_SCL: P3.46 R1.1 R21.1 | length 11.8
  Top Layer w0.152: R1.1@27.305,10.249 v1(28.13,10.249) 28.837,10.249 R21.1@28.88,10.292
  Bottom Layer w0.102: P3.46@24.4,1.55 24.4,4.63 28.13,8.361 v1(28.13,10.249)
DDC_SDA: P3.48 R2.1 R22.1 | length 13.6
  Top Layer w0.152: R2.1@27.305,11.963 v1(28.143,11.963) 28.829,11.963 R22.1@28.88,11.913
  Bottom Layer w0.102: P3.48@25.2,1.55 25.2,5.109 28.575,8.484 28.575,11.532 v1(28.143,11.963)
DIO: P1.5 U4.34 | length 8
  Top Layer w0.152: U4.34@12.423,41.092 12.423,47.22 P1.5@13.73,48.527
DN: P3.4 U4.32 | length 46.8
  Top Layer w0.152: U4.32@13.423,41.092 v1(13.423,42.837)
  Middle2 w0.152: v1(4.534,3.658) 4.94,4.064 4.94,10.96 10.02,16.04 10.02,23.803 13.423,27.206 13.423,28.24 ; 13.423,42.049 v1(13.423,42.837) ; 13.424,28.241 13.424,42.048
  Bottom Layer w0.152: P3.4@4.4,1.55 4.4,3.524 v1(4.534,3.658)
DP: P3.2 U4.33 | length 45.8
  Top Layer w0.152: U4.33@12.923,41.092 v1(12.923,42.189)
  Middle2 w0.152: v1(4.458,4.381) 4.458,10.871 9.754,16.167 9.754,23.927 13.169,27.342 13.169,28.346 ; v1(12.923,42.189) 13.17,41.943 13.17,28.346
  Bottom Layer w0.152: P3.2@3.6,1.55 3.6,3.524 v1(4.458,4.381)
EN_1V1: R15.1 U1.18 U4.10 | length 23.4
  Top Layer w0.152: U4.10@15.923,34.092 15.923,33.409 16.464,32.868 17.628,32.868 17.64,32.88 20.218,32.88 21.552,31.547 v1(22.898,31.547) ; v1(20.892,21.234) R15.1@20.892,22.047 ; v1(25.425,27.457) U1.18@25.425,28.371
  Middle2 w0.152: v1(20.892,21.234) 25.425,25.768 v1(25.425,27.457) 25.425,28.55 22.898,31.077 v1(22.898,31.547)
EN_1V8: R7.1 U1.8 U4.11 | length 11.7
  Top Layer w0.152: U4.11@16.423,34.092 16.423,33.361 16.624,33.16 20.422,33.16 21.184,32.398 22.644,32.398 R7.1@23.52,33.274
  Top Layer w0.203: R7.1@23.52,33.274 23.622,33.274 24.32,32.575 25.044,32.575 25.425,32.194 U1.8@25.425,31.471
GND: C1.1 C2.1 C3.2 C4.2 C5.2 C6.2 C7.1 C8.1 C9.1 C10.1 C11.1 C12.1 C13.1 C14.1 C16.1 C17.1 C18.1 C19.1 C23.2 C25.1 C27.2 C33.1 C34.1 D1.2 FB1.2 K1.2 K2.2 P1.3 P3.26 pad.0 R4.1 R7.2 R8.1 R13.2 R15.2 R16.1 R24.1 R33.2 R34.2 U1.1 U1.4 U1.5 U1.12 U1.13 U1.15 U1.17 U1.21 U2.A10 U2.C9 U2.D4 U2.D5 U2.D6 U2.D7 U2.E4 U2.E5 U2.E6 U2.E7 U2.F4 U2.F5 U2.F6 U2.F7 U2.G4 U2.G5 U2.G6 U2.G7 U2.H1 U2.K10 U3.2 U4.8 U4.23 U4.35 U4.47 U4.49 X1.2 X1.4 | length 22
  Top Layer w0.203: v2(12.332,12.814) 12.332,13.825 U2.K10@13.063,14.557 ; v2(15.138,14.364) 15.628,14.364 U2.G7@15.821,14.557 ; U2.G6@16.281,15.016 U2.G7@15.821,14.557 ; U2.C9@16.74,11.799 17.17,12.229 v2(17.17,12.459) 17.2,12.488 U2.D7@17.2,13.178 ; U2.F6@16.74,14.557 U2.F7@16.281,14.097 U2.G7@15.821,14.557 ; U2.G5@16.74,15.476 U2.E5@17.66,14.557 v2@18.567,13.649 ; v2(17.2,9.563) U2.A10@17.2,10.42 ; U2.E6@17.2,14.097 U2.E7@16.74,13.637 U2.D7@17.2,13.178 ; U2.G4@17.2,15.935 U2.F4@17.66,15.476 U2.E4@18.119,15.016 18.567,14.568 v2@18.567,13.649 ; U2.D6@17.66,13.637 U2.D7@17.2,13.178 ; U2.H1@18.119,17.774 18.119,18.538 19.152,19.571 20.117,19.571 C9.1@20.892,20.345 ; v2(18.567,13.602) v2@18.567,13.649
  Bottom Layer w0.508: P3.26@16.4,1.55 16.4,4.665 16.421,4.686
  other v2: 2.172,4.381 10.808,4.991 26.073,7.302 12.446,9.957 24.613,11.138 24.575,12.84 23.508,14.097 6.275,15.43 24.473,16.497 13.523,19.748 6.35,19.926 14.902,21.006 18.237,21.133 13.221,21.793 2.426,21.882 18.275,24.168 25.946,24.549 20.879,24.651 27.686,27.546 21.806,27.661 12.383,27.915 8.623,28.473 25.425,29.921 21.133,30.721 27.775,31.852 10.325,32.715 20.714,33.795 7.29,34.392 26.492,34.734 24.638,37.236 28.994,37.44 11.824,38.151 24.435,39.141 9.639,39.192 6.553,39.827 11.862,39.878 21.476,40.653 18.885,41.999 4.14,43.663 24.676,44.31
HDMI_C_N: P3.42 U2.C2 | length 22.8
  Top Layer w0.102: U2.C2@19.958,15.016 20.416,15.016 20.853,15.454 20.853,15.625 22.606,17.377 22.606,18.237 v1(22.822,18.453)
  Bottom Layer w0.102: P3.42@22.8,1.55 22.8,2.851 22.501,3.149 22.501,3.562 22.606,3.667 22.606,5.994 ccw(c22.504,5.994) 22.504,6.096 cw(c22.504,6.35) 22.504,6.604 ccw(c22.504,7.061) 22.962,7.061 ccw(c22.504,7.061) 22.606,7.507 22.606,18.237 v1(22.822,18.453)
HDMI_C_P: P3.40 U2.C1 | length 22.8
  Top Layer w0.102: U2.C1@20.417,15.476 22.403,17.461 22.403,18.237 v1(22.187,18.453)
  Bottom Layer w0.102: P3.40@22,1.55 22,2.851 22.298,3.149 22.298,3.646 22.403,3.751 22.403,5.904 cw(c22.504,6.35) 22.504,6.807 ccw(c22.504,7.061) 22.758,7.061 ccw(c22.504,7.061) 22.504,7.315 cw(c22.504,7.417) 22.403,7.417 22.403,13.36 22.403,13.513 22.403,14.072 cw(c22.403,14.351) 22.403,14.63 22.403,15.189 cw(c22.403,15.469) 22.403,15.748 22.403,16.307 cw(c22.403,16.586) 22.403,16.866 22.403,17.424 22.403,18.237 v1(22.187,18.453)
HDMI_D0_N: P3.38 U2.D2 | length 22.8
  Top Layer w0.102: U2.D2@19.498,15.476 19.956,15.476 20.383,15.903 20.383,16.074 21.641,17.331 21.641,18.834 v1(21.857,19.05)
  Bottom Layer w0.102: P3.38@21.2,1.55 21.2,2.851 20.901,3.149 20.901,3.871 21.641,4.61 21.641,18.834 v1(21.857,19.05)
HDMI_D0_P: P3.36 U2.D1 | length 22.8
  Top Layer w0.102: U2.D1@19.958,15.935 21.438,17.415 21.438,18.834 v1(21.222,19.05)
  Bottom Layer w0.102: P3.36@20.4,1.55 20.4,2.851 20.698,3.149 20.698,3.955 21.438,4.694 21.438,13.246 21.438,13.64 cw(c21.438,13.919) 21.438,14.199 21.438,14.757 cw(c21.438,15.037) 21.438,15.316 21.438,15.875 cw(c21.438,16.154) 21.438,16.434 21.438,16.993 21.438,18.834 v1(21.222,19.05)
HDMI_D1_N: P3.34 U2.E2 | length 22.8
  Top Layer w0.102: U2.E2@19.038,15.935 19.496,15.935 19.914,16.353 19.914,16.523 20.676,17.285 20.676,18.237 v1(20.892,18.453)
  Bottom Layer w0.102: P3.34@19.6,1.55 19.6,2.851 19.301,3.149 19.301,3.998 20.676,5.372 20.676,6.188 ccw(c20.574,6.633) 21.031,6.633 ccw(c20.574,6.633) 20.574,7.091 cw(c20.574,7.345) 20.574,7.599 ccw(c20.574,8.056) 21.031,8.056 ccw(c20.574,8.056) 20.574,8.513 cw(c20.574,8.767) 20.574,9.021 ccw(c20.574,9.123) 20.676,9.123 20.676,18.237 v1(20.892,18.453)
HDMI_D1_P: P3.32 U2.E1 | length 22.8
  Top Layer w0.102: U2.E1@19.498,16.395 20.472,17.369 20.472,18.237 v1(20.256,18.453)
  Bottom Layer w0.102: P3.32@18.8,1.55 18.8,2.851 19.098,3.149 19.098,4.082 20.472,5.456 20.472,6.278 cw(c20.574,6.278) 20.574,6.379 ccw(c20.574,6.633) 20.828,6.633 ccw(c20.574,6.633) 20.574,6.887 cw(c20.574,7.345) 20.574,7.802 ccw(c20.574,8.056) 20.828,8.056 ccw(c20.574,8.056) 20.574,8.31 cw(c20.574,8.767) 20.472,9.213 20.472,12.484 20.472,12.878 20.472,13.437 cw(c20.472,13.716) 20.472,13.995 20.472,14.554 cw(c20.472,14.834) 20.472,15.113 20.472,15.672 cw(c20.472,15.951) 20.472,16.231 20.472,16.789 20.472,18.237 v1(20.256,18.453)
HDMI_D2_N: P3.30 U2.F2 | length 22.9
  Top Layer w0.102: U2.F2@18.579,16.395 19.037,16.395 19.456,16.815 19.456,16.985 19.774,17.303 19.774,18.834 v1(19.99,19.05)
  Bottom Layer w0.102: P3.30@18,1.55 18,2.851 17.701,3.149 17.701,4.011 19.774,6.083 19.774,9.449 ccw(c19.672,9.449) 19.672,9.55 cw(c19.672,9.804) 19.672,10.058 ccw(c19.672,10.516) 20.13,10.516 ccw(c19.672,10.516) 19.774,10.961 19.774,18.834 v1(19.99,19.05)
HDMI_D2_P: P3.28 U2.F1 | length 22.8
  Top Layer w0.102: U2.F1@19.038,16.855 19.571,17.387 19.571,18.834 v1(19.355,19.05)
  Bottom Layer w0.102: P3.28@17.2,1.55 17.2,2.851 17.498,3.149 17.498,4.095 19.571,6.167 19.571,9.359 cw(c19.672,9.804) 19.672,10.262 ccw(c19.672,10.516) 19.926,10.516 ccw(c19.672,10.516) 19.672,10.77 cw(c19.672,10.871) 19.571,10.871 19.571,11.62 19.571,11.9 cw(c19.571,12.179) 19.571,12.459 19.571,13.018 cw(c19.571,13.297) 19.571,13.576 19.571,14.135 cw(c19.571,14.414) 19.571,14.694 19.571,15.253 19.571,18.834 v1(19.355,19.05)
HDPI: R25.2 U2.A4 | length 7.6
  Top Layer w0.102: U2.A4@19.958,13.178 24.411,8.725 R25.2@25.725,8.725
HDPO: P3.52 R26.1 U2.B4 | length 19.6
  Top Layer w0.102: U2.B4@19.498,13.637 19.954,13.637 24.295,9.296 v1(24.752,9.296)
  Top Layer w0.254: v2(28.88,4.153) R26.1@28.88,5.138
  Middle2 w0.152: v1(24.752,9.296) 25.59,9.296 28.88,6.007 v2(28.88,4.153)
  Bottom Layer w0.152: P3.52@26.8,1.55 26.8,3.343 27.61,4.153 v2(28.88,4.153)